# Altium PCB Tassel43_Without_RGB_Left.pcbdoc
Units mil, origin at the board's own origin, x right, y up, seen from the top; angles counter-clockwise.
Board outline 4500 x 3700 mil, 2 copper layers (Top Layer, Bottom Layer); 30 components, 26 nets, 71 pads, 15 vias.
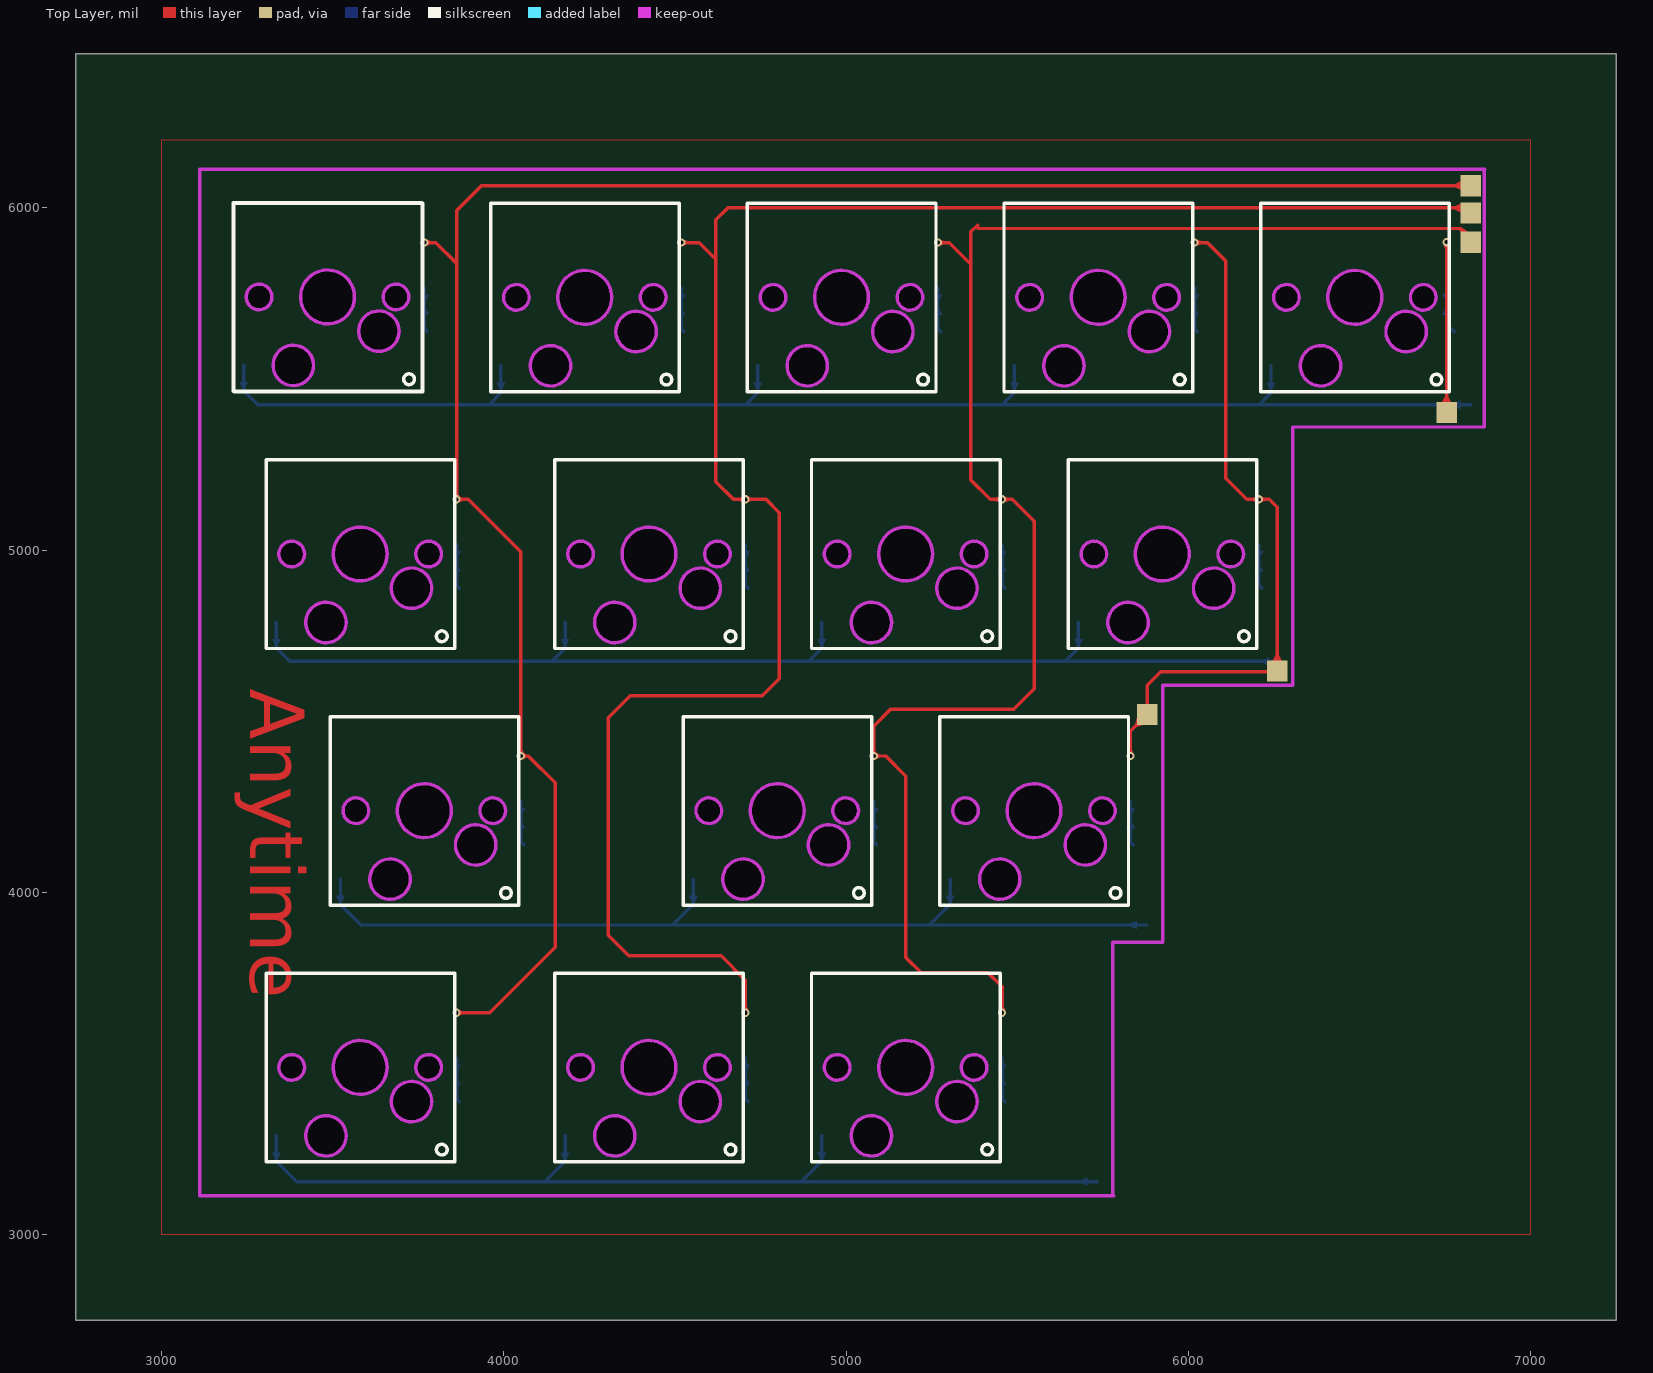
[diagram p0: Top Layer view]
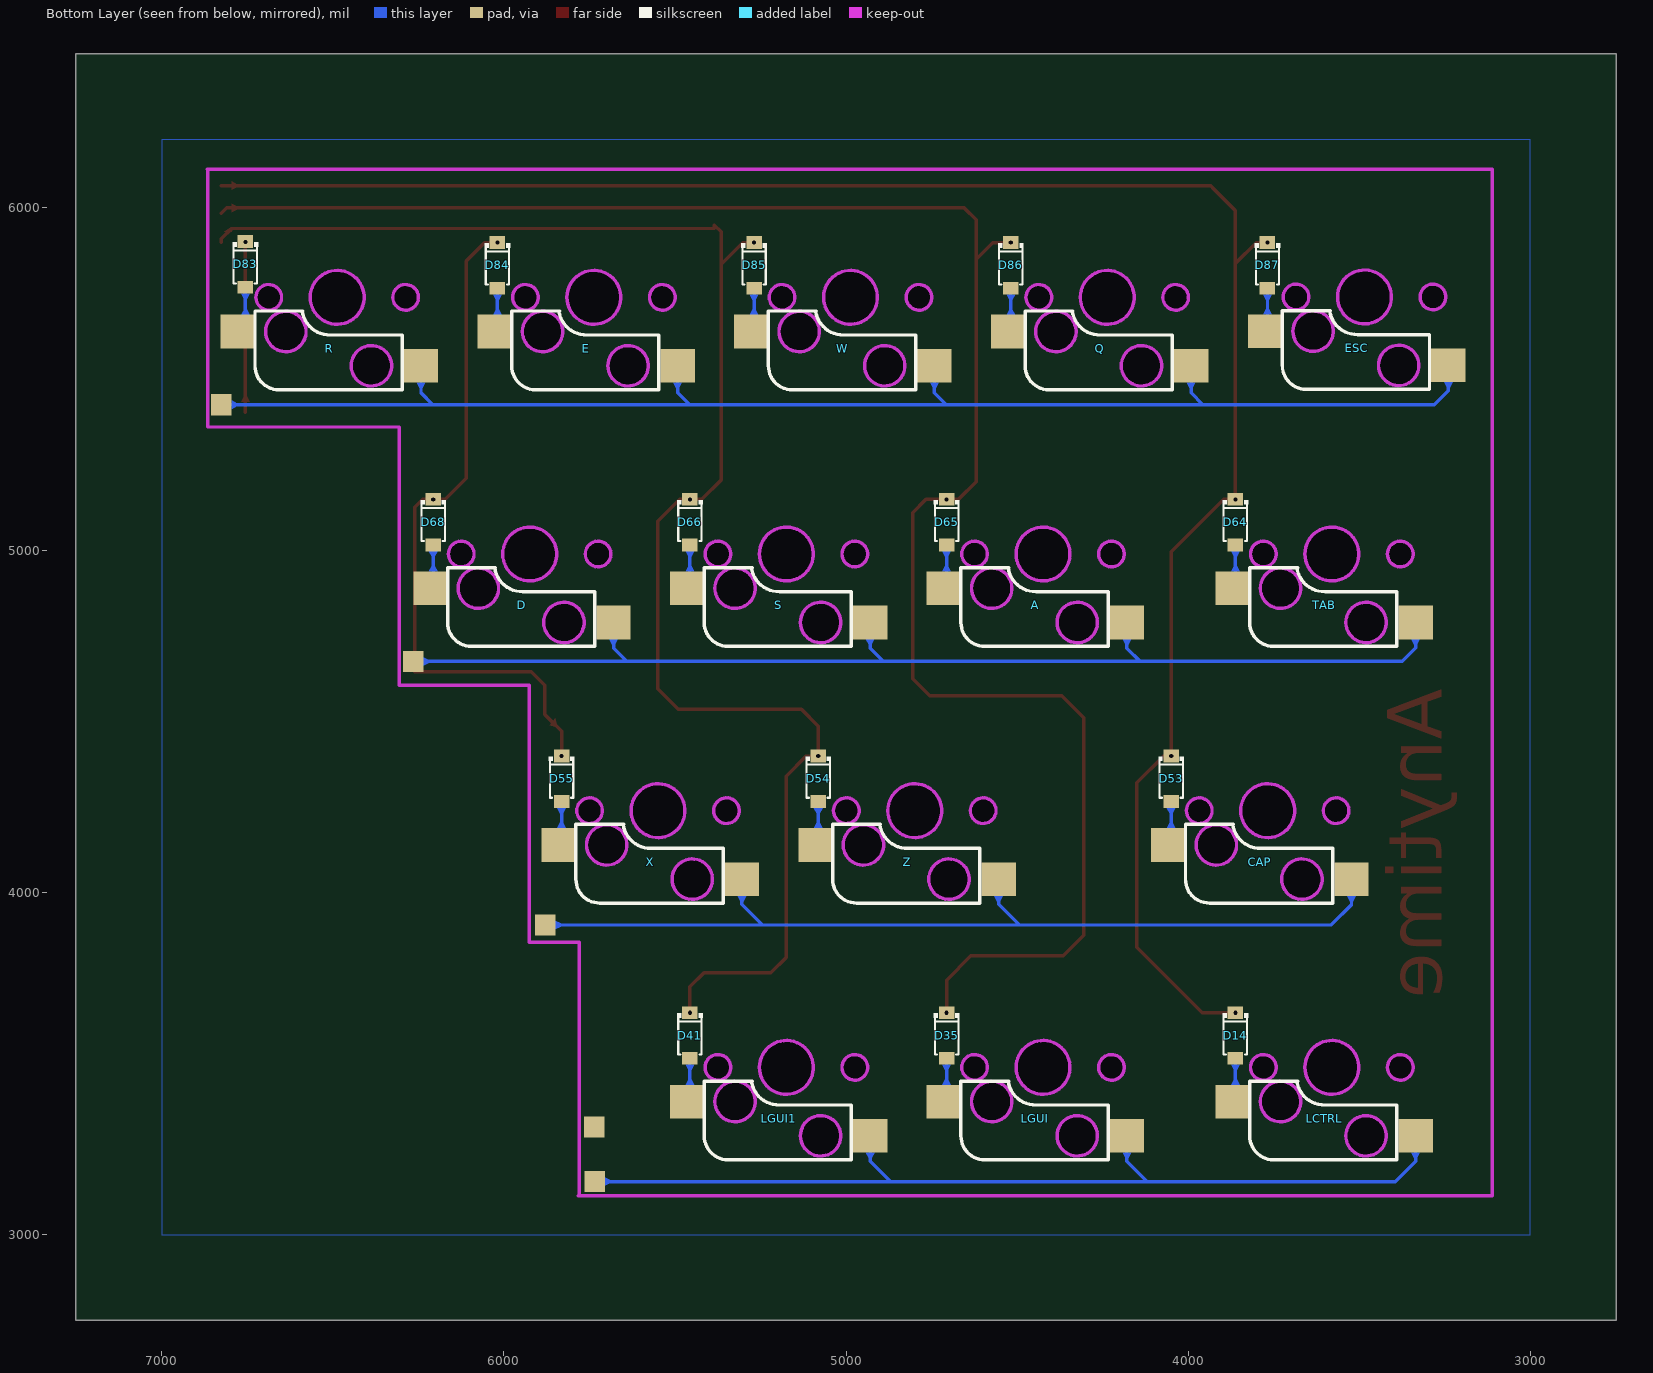
[diagram p1: Bottom Layer view, seen from below]

## Layer stack, top to bottom
Top Layer: signal copper (thickness not stored)
Dielectric: dielectric 12.6, FR-4, Dk 4.8
Bottom Layer: signal copper (thickness not stored)

## Board outline
7250,2750 2750,2750 2750,6450 7250,6450

## Components (designator, comment, footprint, x,y, rotation, side; value= is the part's Value field where it differs from the comment)
A "凯华热插拨" 凯华热插拨 4424.24,4988.9 r0 top
CAP "凯华热插拨" 凯华热插拨 3767.93,4238.89 r0 top
D "凯华热插拨" 凯华热插拨 5924.24,4988.9 r0 top
D14 "1N4148W" SOD-123_L2.8-W1.8-LS3.7-RD 3862.26,3582 r270 bottom
D35 "1N4148W" SOD-123_L2.8-W1.8-LS3.7-RD 4706.02,3582 r270 bottom
D41 "1N4148W" SOD-123_L2.8-W1.8-LS3.7-RD 5456.04,3582 r270 bottom
D53 "1N4148W" SOD-123_L2.8-W1.8-LS3.7-RD 4049.76,4332.01 r270 bottom
D54 "1N4148W" SOD-123_L2.8-W1.8-LS3.7-RD 5081.03,4332.01 r270 bottom
D55 "1N4148W" SOD-123_L2.8-W1.8-LS3.7-RD 5831.05,4332.01 r270 bottom
D64 "1N4148W" SOD-123_L2.8-W1.8-LS3.7-RD 3862.26,5082.03 r270 bottom
D65 "1N4148W" SOD-123_L2.8-W1.8-LS3.7-RD 4706.02,5082.03 r270 bottom
D66 "1N4148W" SOD-123_L2.8-W1.8-LS3.7-RD 5456.04,5082.03 r270 bottom
D68 "1N4148W" SOD-123_L2.8-W1.8-LS3.7-RD 6206.06,5082.03 r270 bottom
D83 "1N4148W" SOD-123_L2.8-W1.8-LS3.7-RD 6755,5835 r270 bottom
D84 "1N4148W" SOD-123_L2.8-W1.8-LS3.7-RD 6018.55,5832.05 r270 bottom
D85 "1N4148W" SOD-123_L2.8-W1.8-LS3.7-RD 5268.54,5832.05 r270 bottom
D86 "1N4148W" SOD-123_L2.8-W1.8-LS3.7-RD 4518.52,5832.05 r270 bottom
D87 "1N4148W" SOD-123_L2.8-W1.8-LS3.7-RD 3768.51,5832.05 r270 bottom
E "凯华热插拨" 凯华热插拨 5736.74,5738.89 r0 top
ESC "凯华热插拨" 凯华热插拨 3485,5740 r0 top
LCTRL "凯华热插拨" 凯华热插拨 3580.49,3488.89 r0 top
LGUI "凯华热插拨" 凯华热插拨 4424.24,3488.89 r0 top
LGUI1 "凯华热插拨" 凯华热插拨 5174.23,3488.89 r0 top
Q "凯华热插拨" 凯华热插拨 4236.74,5738.89 r0 top
R "凯华热插拨" 凯华热插拨 6486.74,5738.89 r0 top
S "凯华热插拨" 凯华热插拨 5174.24,4988.9 r0 top
TAB "凯华热插拨" 凯华热插拨 3580.49,4988.9 r0 top
W "凯华热插拨" 凯华热插拨 4986.74,5738.89 r0 top
X "凯华热插拨" 凯华热插拨 5549.17,4238.89 r0 top
Z "凯华热插拨" 凯华热插拨 4799.17,4238.89 r0 top

## Footprints (in the part's own frame and the unit in brackets; to place one, negate y for a bottom-side part, rotate by r counter-clockwise, add the part's x,y. Pads: shape width x height; smd on the part's side, far side on the other; paste and mask are expansions set on the pad)
SOD-123_L2.8-W1.8-LS3.7-RD [mm]
  rect 0.95x1.15 smd: 1(-1.692,0) 2(1.692,0)
  silkscreen extent -1.63,-0.94 1.41,0.94
凯华热插拨 [mm]
  rect 2.55x2.5 smd far side: K1(-6.223,-5.08) K2(7.366,-2.54)
  Multi-Layer board cut-out: 2,0 1.729,0.996 0.997,1.724 0,1.99 -0.997,1.724 -1.729,0.996 -2,0 -2,0 -1.729,-0.996 -0.997,-1.724 0,-1.99 0.997,-1.724 1.729,-0.996 2,0
  Multi-Layer board cut-out: -1.04,-5.08 -1.189,-4.429 -1.605,-3.907 -2.206,-3.618 -2.874,-3.617 -3.475,-3.907 -3.891,-4.429 -4.04,-5.08 -4.04,-5.08 -3.839,-5.83 -3.29,-6.379 -2.54,-6.58 -1.79,-6.379 -1.241,-5.83 -1.04,-5.08
  Multi-Layer board cut-out: 5.31,-2.54 5.161,-1.889 4.745,-1.367 4.144,-1.078 3.476,-1.077 2.875,-1.367 2.459,-1.889 2.31,-2.54 2.31,-2.54 2.511,-3.29 3.06,-3.839 3.81,-4.04 4.56,-3.839 5.109,-3.29 5.31,-2.54
  Multi-Layer board cut-out: -4.127,0 -4.257,0.473 -4.606,0.819 -5.08,0.946 -5.554,0.819 -5.903,0.473 -6.032,0 -6.032,0 -5.903,-0.473 -5.554,-0.819 -5.08,-0.945 -4.606,-0.819 -4.257,-0.473 -4.128,0
  Multi-Layer board cut-out: 6.032,0 5.903,0.473 5.554,0.819 5.08,0.946 4.606,0.819 4.257,0.473 4.128,0 4.128,0 4.257,-0.473 4.606,-0.819 5.08,-0.945 5.554,-0.819 5.903,-0.473 6.032,0
  silkscreen extent -6.98,-7.01 7.01,6.98

## Free pads (board coordinates)
  rect 59.84x61.81 smd: 6(6825,6065) 7(6825,5985) 9(6825,5900) 16(6755,5402.76) 18(6260,4646.72) 26(5880,4520)
  rect 59.84x61.81 smd far side: 14(6824.86,5425) 21(6265,4675) 22(5735,3315) 22(5878.74,3905) 24(5734.76,3155)

## Via types
v1: diameter 24, hole 12, Top Layer to Bottom Layer, 15 vias

## Nets (pads, with @x,y where several pads share a name; then routed paths per layer and width w, separated by ;. In a path a pad name is that pad's centre, name@x,y a point inside that pad or via, vN(x,y) a via of type N, cw(c..) or ccw(c..) an arc to the next point about the centre after c; other vN are vias at no path point)
A1_4: A.K2 D65.2 | length 129.9
  Bottom Layer w10: D65.2 4706,4897.1 A.K2
COL0: D14.1 D53.1 D64.1 D87.1 pad.6 | length 5783
  Top Layer w10: v1(3768.51,5898.68) 3801.3,5898.7 3862.3,5837.7 ; v1(3862.26,3648.63) 3958.6,3648.6 4150,3840 4150,4320 4071.4,4398.6 v1(4049.76,4398.64) 4049.8,4995.2 3896.3,5148.7 v1(3862.26,5148.66) 3862.3,5837.7 ; pad.6 3934.8,6065 3924.8,6055 3862.3,5992.5 3862.3,5837.7
COL1: D35.1 D65.1 D86.1 pad.7 | length 5577.8
  Top Layer w10: v1(4518.52,5898.68) 4571.3,5898.7 4620,5850 ; 4654.8,5999.8 4620,5965 4620,5850 ; 4654.8,6000 6790,6000 ; v1(4706.03,5148.66) 4671.3,5148.7 4620,5200 4620,5850 ; v1(4706.03,3648.63) 4706.03,3743.97 4635,3815 4365,3815 4305,3875 4305,4510 4370,4575 4755,4575 4805,4625 4805,5110 4766.34,5148.66 v1(4706.03,5148.66) ; 6765,6000 6810,6000 pad.7
COL2: D41.1 D54.1 D66.1 D85.1 pad.9 | length 4719.9
  Top Layer w10: v1(5268.54,5898.68) 5301.3,5898.7 5365,5835 ; 5384.9,5949.9 5365,5930 5365,5835 ; 5385,5950 5385,5940 6795,5940 ; v1(5456.04,5148.66) 5421.2,5148.7 5365,5205.1 5365,5835 ; v1(5456.04,3648.63) 5456.04,3723.96 5415,3765 5220,3765 5175,3810 5175,4340 5116.36,4398.64 v1(5081.03,4398.64) 5081.03,4486.03 5130,4535 5490,4535 5550,4595 5550,5085 5486.34,5148.66 v1(5456.04,5148.66) ; 6790,5940 6795,5940 ; pad.9 6825,5910 6795,5940
COL3: D55.1 D68.1 D84.1 pad.18 pad.26 | length 2035.5
  Top Layer w10: v1(5831.05,4398.64) 5831,4471 pad.26 5880,4605 5920,4645 pad.18@6260,4645 ; v1@6018.5,5898.7 6056.3,5898.7 6110,5845 6110,5210 6171.3,5148.7 v1(6206.06,5148.66) 6236.3,5148.7 6260,5125 pad.18@6260,4675.3 ; pad.18 pad.18@6260,4675.33
  other v1: 6018.55,5898.68
COL4: D83.1 pad.16 | length 497.2
  Top Layer w10: pad.16 v1(6755,5900)
D14_2: D14.2 LCTRL.K2 | length 129.9
  Bottom Layer w10: D14.2 3862.3,3397.1 LCTRL.K2
D53_2: CAP.K2 D53.2 | length 129.8
  Bottom Layer w10: D53.2 4049.8,4147.1 CAP.K2
D64_2: D64.2 TAB.K2 | length 129.9
  Bottom Layer w10: D64.2 3862.3,4897.1 TAB.K2
D67_4: D68.2 D.K2 | length 129.8
  Bottom Layer w10: D68.2 6206.1,4897.1 D.K2
D83_2: D83.2 R.K2 | length 138.5
  Bottom Layer w10: D83.2 6755,5660.6 R.K2
D84_2: D84.2 E.K2 | length 129.9
  Bottom Layer w10: D84.2@6018.5,5765.4 6018.5,5647.1 E.K2
D85_2: D85.2 W.K2 | length 129.9
  Bottom Layer w10: D85.2 5268.5,5647.1 W.K2
D86_2: D86.2 Q.K2 | length 129.9
  Bottom Layer w10: D86.2 4518.5,5647.1 Q.K2
ESC1_4: D87.2 ESC.K2 | length 128.1
  Bottom Layer w10: D87.2 3768.5,5646.5 ESC.K2
GND: pad.22@5735,3315
LALT1_4: D41.2 LGUI1.K2 | length 129.9
  Bottom Layer w10: D41.2 5456,3397.1 LGUI1.K2
LGUI1_4: D35.2 LGUI.K2 | length 129.9
  Bottom Layer w10: D35.2 4706,3397.1 LGUI.K2
ROW0: E.K1 ESC.K1 pad.14 Q.K1 R.K1 W.K1 | length 4188.6
  Bottom Layer w10: ESC.K1 3240,5465.6 3280.6,5425 pad.14 ; 3957.1,5425.1 3991.7,5459.7 Q.K1 ; 4707.1,5425.1 4741.7,5459.7 W.K1 ; 5457.1,5425.1 5491.7,5459.7 E.K1 ; 6207.1,5425.1 6241.7,5459.7 R.K1
ROW1: A.K1 D.K1 pad.21 S.K1 TAB.K1 | length 3409.6
  Bottom Layer w10: TAB.K1 3335.5,4714.5 3375,4675 pad.21 ; 4140.9,4675 4179.2,4713.3 A.K1 ; 4890.9,4675 4929.2,4713.3 S.K1 ; 5640.9,4675 5679.2,4713.3 D.K1
ROW2: CAP.K1 pad.22@5878.74,3905 X.K1 Z.K1 | length 2772.4
  Bottom Layer w10: CAP.K1 3522.9,3964.5 3582.4,3905 pad.22@5878.7,3905 ; 4494.1,3905 4554.1,3965 Z.K1@4554.1,4038.9 ; 5244.1,3905 5304.1,3965 X.K1@5304.1,4038.9
ROW3: LCTRL.K1 LGUI1.K1 LGUI.K1 pad.24 | length 2815.9
  Bottom Layer w10: LCTRL.K1 3335.5,3214.5 3395,3155 pad.24 ; 4119.2,3155 4179.2,3215 LGUI.K1 ; 4869.2,3155 4929.2,3215 LGUI1.K1
S1_4: D66.2 S.K2 | length 129.9
  Bottom Layer w10: D66.2 5456,4897.1 S.K2
X2_4: D55.2 X.K2 | length 129.9
  Bottom Layer w10: D55.2@5831,4265.4 5831,4147 X.K2
Z1_4: D54.2 Z.K2 | length 129.9
  Bottom Layer w10: D54.2 5081,4147 Z.K2
"": 

## Polygon pours and split planes (outlines as drawn)
GND on Top Layer (hatched 45Degree grid 30 track 10, pour order 0): 3000,6200 7000,6200 7000,3000 3000,3000
GND on Bottom Layer (hatched 45Degree grid 30 track 10, pour order 4): 3000,6200 7000,6200 7000,3000 3000,3000

## Keep-outs
Board Outline Layer:
  lines w10 net "": 5780,3115 5780,3855 5925,3855 5925,4605 6305,4605 6305,5360 6865,5360 6865,6110 ; 5782.5,3113.3 3112.3,3113.3 3112.3,6113.3 6865.9,6113.3
Multi-Layer:
  circle w10: c3485,5740 r78.74
  circle w10: c3385,5540 r59.05
  circle w10: c3635,5640 r59.05
  circle w10: c3285,5740 r37.5
  circle w10: c3685,5740 r37.5
  circle w10: c3580.49,4988.9 r78.74
  circle w10: c3480.49,4788.9 r59.05
  circle w10: c3730.49,4888.9 r59.05
  circle w10: c3380.49,4988.9 r37.5
  circle w10: c3780.49,4988.9 r37.5
  circle w10: c3767.93,4238.89 r78.74
  circle w10: c3667.93,4038.89 r59.05
  circle w10: c3917.93,4138.89 r59.05
  circle w10: c3567.93,4238.89 r37.5
  circle w10: c3967.93,4238.89 r37.5
  circle w10: c3580.49,3488.89 r78.74
  circle w10: c3480.49,3288.89 r59.05
  circle w10: c3730.49,3388.89 r59.05
  circle w10: c3380.49,3488.89 r37.5
  circle w10: c3780.49,3488.89 r37.5
  circle w10: c4424.24,3488.89 r78.74
  circle w10: c4324.24,3288.89 r59.05
  circle w10: c4574.24,3388.89 r59.05
  circle w10: c4224.24,3488.89 r37.5
  circle w10: c4624.24,3488.89 r37.5
  circle w10: c4236.74,5738.89 r78.74
  circle w10: c4136.74,5538.89 r59.05
  circle w10: c4386.74,5638.89 r59.05
  circle w10: c4036.74,5738.89 r37.5
  circle w10: c4436.74,5738.89 r37.5
  circle w10: c4986.74,5738.89 r78.74
  circle w10: c4886.74,5538.89 r59.05
  circle w10: c5136.74,5638.89 r59.05
  circle w10: c4786.74,5738.89 r37.5
  circle w10: c5186.74,5738.89 r37.5
  circle w10: c5736.74,5738.89 r78.74
  circle w10: c5636.74,5538.89 r59.05
  circle w10: c5886.74,5638.89 r59.05
  circle w10: c5536.74,5738.89 r37.5
  circle w10: c5936.74,5738.89 r37.5
  circle w10: c6486.74,5738.89 r78.74
  circle w10: c6386.74,5538.89 r59.05
  circle w10: c6636.74,5638.89 r59.05
  circle w10: c6286.74,5738.89 r37.5
  circle w10: c6686.74,5738.89 r37.5
  circle w10: c4424.24,4988.9 r78.74
  circle w10: c4324.24,4788.9 r59.05
  circle w10: c4574.24,4888.9 r59.05
  circle w10: c4224.24,4988.9 r37.5
  circle w10: c4624.24,4988.9 r37.5
  circle w10: c5174.24,4988.9 r78.74
  circle w10: c5074.24,4788.9 r59.05
  circle w10: c5324.24,4888.9 r59.05
  circle w10: c4974.24,4988.9 r37.5
  circle w10: c5374.24,4988.9 r37.5
  circle w10: c5924.24,4988.9 r78.74
  circle w10: c5824.24,4788.9 r59.05
  circle w10: c6074.24,4888.9 r59.05
  circle w10: c5724.24,4988.9 r37.5
  circle w10: c6124.24,4988.9 r37.5
  circle w10: c4799.17,4238.89 r78.74
  circle w10: c4699.17,4038.89 r59.05
  circle w10: c4949.17,4138.89 r59.05
  circle w10: c4599.17,4238.89 r37.5
  circle w10: c4999.17,4238.89 r37.5
  circle w10: c5549.17,4238.89 r78.74
  circle w10: c5449.17,4038.89 r59.05
  circle w10: c5699.17,4138.89 r59.05
  circle w10: c5349.17,4238.89 r37.5
  circle w10: c5749.17,4238.89 r37.5
  circle w10: c5174.23,3488.89 r78.74
  circle w10: c5074.23,3288.89 r59.05
  circle w10: c5324.23,3388.89 r59.05
  circle w10: c4974.23,3488.89 r37.5
  circle w10: c5374.23,3488.89 r37.5

## Other copper
Top Layer:
  region net COL3: 5865.15,4489.09 5850.08,4509.04 5844.49,4491.56 5850.57,4483.5
  region net COL3: 6247.5,4677.62 6272.5,4677.62 6265,4692.62 6255,4692.62
  region net COL4: 6742.5,5433.67 6767.5,5433.67 6760,5448.67 6750,5448.67
  region net COL2: 6795.08,5930.91 6816.59,5930.91 6802.07,5940 6791.46,5936.46
  region net COL1: 6795.08,5987.5 6795.08,6012.5 6780.08,6005 6780.08,5995
  region net COL0: 6795.08,6052.5 6795.08,6077.5 6780.08,6070 6780.08,6060
  region net COL4: 6746,5892.06 6764,5892.06 6760,5883.66 6750,5883.66
  region net COL3: 6026.5,5889.69 6026.47,5907.69 6034.88,5903.7 6034.89,5893.7
  region net COL3: 6198.15,5157.68 6198.1,5139.68 6189.71,5143.7 6189.74,5153.7
  region net COL3: 6214.02,5139.68 6213.97,5157.68 6222.38,5153.7 6222.41,5143.7
  region net COL2: 5447.04,3656.57 5465.04,3656.57 5461.04,3664.97 5451.04,3664.97
  region net COL3: 5840.03,4406.6 5822.03,4406.55 5826,4414.96 5836,4414.99
  region net COL2: 5448.13,5157.68 5448.08,5139.68 5439.69,5143.7 5439.72,5153.7
  region net COL2: 5463.98,5139.66 5463.98,5157.66 5472.38,5153.66 5472.38,5143.66
  region net COL2: 5276.49,5889.69 5276.47,5907.69 5284.87,5903.7 5284.88,5893.7
  region net COL1: 4526.47,5889.69 4526.45,5907.69 4534.85,5903.7 4534.86,5893.7
  region net COL1: 4713.97,5139.66 4713.97,5157.66 4722.37,5153.66 4722.37,5143.66
  region net COL1: 4698.12,5157.68 4698.07,5139.68 4689.68,5143.7 4689.71,5153.7
  region net COL1: 4697.03,3656.57 4715.03,3656.57 4711.03,3664.97 4701.03,3664.97
  region net COL2: 5088.97,4389.64 5088.97,4407.64 5097.37,4403.64 5097.37,4393.64
  region net COL2: 5072.03,4406.58 5090.03,4406.58 5086.03,4414.98 5076.03,4414.98
  region net COL0: 3870.21,3657.62 3870.18,3639.62 3878.59,3643.6 3878.61,3653.6
  region net COL0: 4058.78,4406.56 4040.78,4406.6 4044.8,4414.99 4054.8,4414.97
  region net COL0: 4057.72,4407.62 4057.68,4389.62 4066.09,4393.6 4066.11,4403.6
  region net COL0: 3871.28,5156.58 3853.28,5156.62 3857.3,5165.01 3867.3,5164.98
  region net COL0: 3870.22,5139.68 3870.18,5157.68 3878.59,5153.7 3878.61,5143.7
  region net COL0: 3776.46,5889.69 3776.44,5907.69 3784.84,5903.7 3784.85,5893.7
  text "Anytime" at 3260,4595 h158.74 r270
Bottom Layer:
  region net LALT1_4: 5443.54,3438.09 5468.54,3438.09 5461.04,3453.09 5451.04,3453.09
  region net ROW3: 4941.69,3239.69 4916.69,3239.69 4924.19,3224.69 4934.19,3224.69
  region net X2_4: 5818.55,4188.09 5843.55,4188.09 5836.05,4203.09 5826.05,4203.09
  region net ROW2: 5316.64,3989.69 5291.64,3989.69 5299.14,3974.69 5309.14,3974.69
  region net Z1_4: 5068.53,4188.09 5093.53,4188.09 5086.03,4203.09 5076.03,4203.09
  region net ROW2: 4566.64,3989.69 4541.64,3989.69 4549.14,3974.69 4559.14,3974.69
  region net D67_4: 6193.56,4938.1 6218.56,4938.1 6211.06,4953.1 6201.06,4953.1
  region net ROW1: 5691.74,4739.69 5666.74,4739.69 5674.24,4724.69 5684.24,4724.69
  region net S1_4: 5443.54,4938.1 5468.54,4938.1 5461.04,4953.1 5451.04,4953.1
  region net ROW1: 4941.74,4739.69 4916.74,4739.69 4924.24,4724.69 4934.24,4724.69
  region net A1_4: 4693.53,4938.1 4718.53,4938.1 4711.03,4953.1 4701.03,4953.1
  region net ROW1: 4191.74,4739.69 4166.74,4739.69 4174.24,4724.69 4184.24,4724.69
  region net D83_2: 6742.5,5688.09 6767.5,5688.09 6760,5703.09 6750,5703.09
  region net ROW0: 6254.24,5489.69 6229.24,5489.69 6236.74,5474.69 6246.74,5474.69
  region net D84_2: 6006.05,5688.09 6031.05,5688.09 6023.55,5703.09 6013.55,5703.09
  region net ROW0: 5504.24,5489.69 5479.24,5489.69 5486.74,5474.69 5496.74,5474.69
  region net D85_2: 5256.04,5688.09 5281.04,5688.09 5273.54,5703.09 5263.54,5703.09
  region net ROW0: 4754.24,5489.69 4729.24,5489.69 4736.74,5474.69 4746.74,5474.69
  region net D86_2: 4506.02,5688.09 4531.02,5688.09 4523.52,5703.09 4513.52,5703.09
  region net ROW0: 4004.24,5489.69 3979.24,5489.69 3986.74,5474.69 3996.74,5474.69
  region net LGUI1_4: 4693.53,3438.09 4718.53,3438.09 4711.03,3453.09 4701.03,3453.09
  region net ROW3: 4191.7,3239.69 4166.7,3239.69 4174.2,3224.69 4184.2,3224.69
  region net D14_2: 3849.76,3438.09 3874.76,3438.09 3867.26,3453.09 3857.26,3453.09
  region net ROW3: 3347.99,3239.69 3322.99,3239.69 3330.49,3224.69 3340.49,3224.69
  region net D53_2: 4037.26,4188.09 4062.26,4188.09 4054.76,4203.09 4044.76,4203.09
  region net ROW2: 3535.4,3989.69 3510.4,3989.69 3517.9,3974.69 3527.9,3974.69
  region net D64_2: 3849.76,4938.1 3874.76,4938.1 3867.26,4953.1 3857.26,4953.1
  region net ROW1: 3348,4739.69 3323,4739.69 3330.5,4724.69 3340.5,4724.69
  region net ESC1_4: 3756.01,5689.2 3781.01,5689.2 3773.51,5704.2 3763.51,5704.2
  region net ROW0: 3252.5,5490.8 3227.5,5490.8 3235,5475.8 3245,5475.8
  region net ROW3: 5704.84,3142.5 5704.84,3167.5 5689.84,3160 5689.84,3150
  region net ROW2: 5848.82,3892.5 5848.82,3917.5 5833.82,3910 5833.82,3900
  region net ROW1: 6235.08,4662.5 6235.08,4687.5 6220.08,4680 6220.08,4670
  region net ROW0: 6794.94,5412.5 6794.94,5437.5 6779.94,5430 6779.94,5420
  region net D14_2: 3849.76,3496.67 3874.76,3496.67 3867.26,3481.67 3857.26,3481.67
  region net LGUI1_4: 4693.53,3496.67 4718.53,3496.67 4711.03,3481.67 4701.03,3481.67
  region net LALT1_4: 5443.54,3496.67 5468.54,3496.67 5461.04,3481.67 5451.04,3481.67
  region net D53_2: 4037.26,4246.68 4062.26,4246.68 4054.76,4231.68 4044.76,4231.68
  region net Z1_4: 5068.53,4246.68 5093.53,4246.68 5086.03,4231.68 5076.03,4231.68
  region net X2_4: 5818.55,4246.68 5843.55,4246.68 5836.05,4231.68 5826.05,4231.68
  region net D64_2: 3849.76,4996.7 3874.76,4996.7 3867.26,4981.7 3857.26,4981.7
  region net A1_4: 4693.53,4996.7 4718.53,4996.7 4711.03,4981.7 4701.03,4981.7
  region net S1_4: 5443.54,4996.7 5468.54,4996.7 5461.04,4981.7 5451.04,4981.7
  region net D67_4: 6193.56,4996.7 6218.56,4996.7 6211.06,4981.7 6201.06,4981.7
  region net D83_2: 6742.5,5749.67 6767.5,5749.67 6760,5734.67 6750,5734.67
  region net D84_2: 6006.05,5746.71 6031.05,5746.71 6023.55,5731.71 6013.55,5731.71
  region net D85_2: 5256.04,5746.71 5281.04,5746.71 5273.54,5731.71 5263.54,5731.71
  region net D86_2: 4506.02,5746.71 4531.02,5746.71 4523.52,5731.71 4513.52,5731.71
  region net ESC1_4: 3756.01,5746.71 3781.01,5746.71 3773.51,5731.71 3763.51,5731.71

## Silkscreen, mask and mechanical layers (free items; w line width, h text height)
Top Silkscreen Layer:
  lines w10 net "": 3211.74,5462.73 3762.9,5462.73 3762.9,6013.88 3211.74,6013.88 3211.74,5462.73 ; 3305.49,3212.72 3856.65,3212.72 3856.65,3763.88 3305.49,3763.88 3305.49,3212.72 ; 3305.49,4712.73 3856.65,4712.73 3856.65,5263.88 3305.49,5263.88 3305.49,4712.73 ; 3492.93,3962.72 4044.15,3962.72 4044.15,4513.88 3492.93,4513.88 3492.93,3962.72 ; 3961.74,5462.73 4512.9,5462.73 4512.9,6013.88 3961.74,6013.88 3961.74,5462.73 ; 4149.24,3212.72 4700.39,3212.72 4700.39,3763.88 4149.24,3763.88 4149.24,3212.72 ; 4149.24,4712.73 4700.39,4712.73 4700.39,5263.88 4149.24,5263.88 4149.24,4712.73 ; 4524.24,3962.72 5075.39,3962.72 5075.39,4513.88 4524.24,4513.88 4524.24,3962.72 ; 4711.74,5462.73 5262.89,5462.73 5262.89,6013.88 4711.74,6013.88 4711.74,5462.73 ; 4899.24,3212.72 5450.39,3212.72 5450.39,3763.88 4899.24,3763.88 4899.24,3212.72 ; 4899.24,4712.73 5450.39,4712.73 5450.39,5263.88 4899.24,5263.88 4899.24,4712.73 ; 5274.24,3962.72 5825.39,3962.72 5825.39,4513.88 5274.24,4513.88 5274.24,3962.72 ; 5461.74,5462.73 6012.89,5462.73 6012.89,6013.88 5461.74,6013.88 5461.74,5462.73 ; 5649.24,4712.73 6200.39,4712.73 6200.39,5263.88 5649.24,5263.88 5649.24,4712.73 ; 6211.74,5462.73 6762.89,5462.73 6762.89,6013.88 6211.74,6013.88 6211.74,5462.73